# Altium PCB MT-MONITOR V1.0.0.PcbDoc (part 2 of 3)
Units mil, origin at the board's own origin, x right, y up, seen from the top; angles counter-clockwise.
Board outline 6300 x 4410 mil, 2 copper layers (Top Layer, Bottom Layer); 313 components, 231 nets, 1781 pads, 138 vias.
Unrouted connection lines stored in the file: 1.
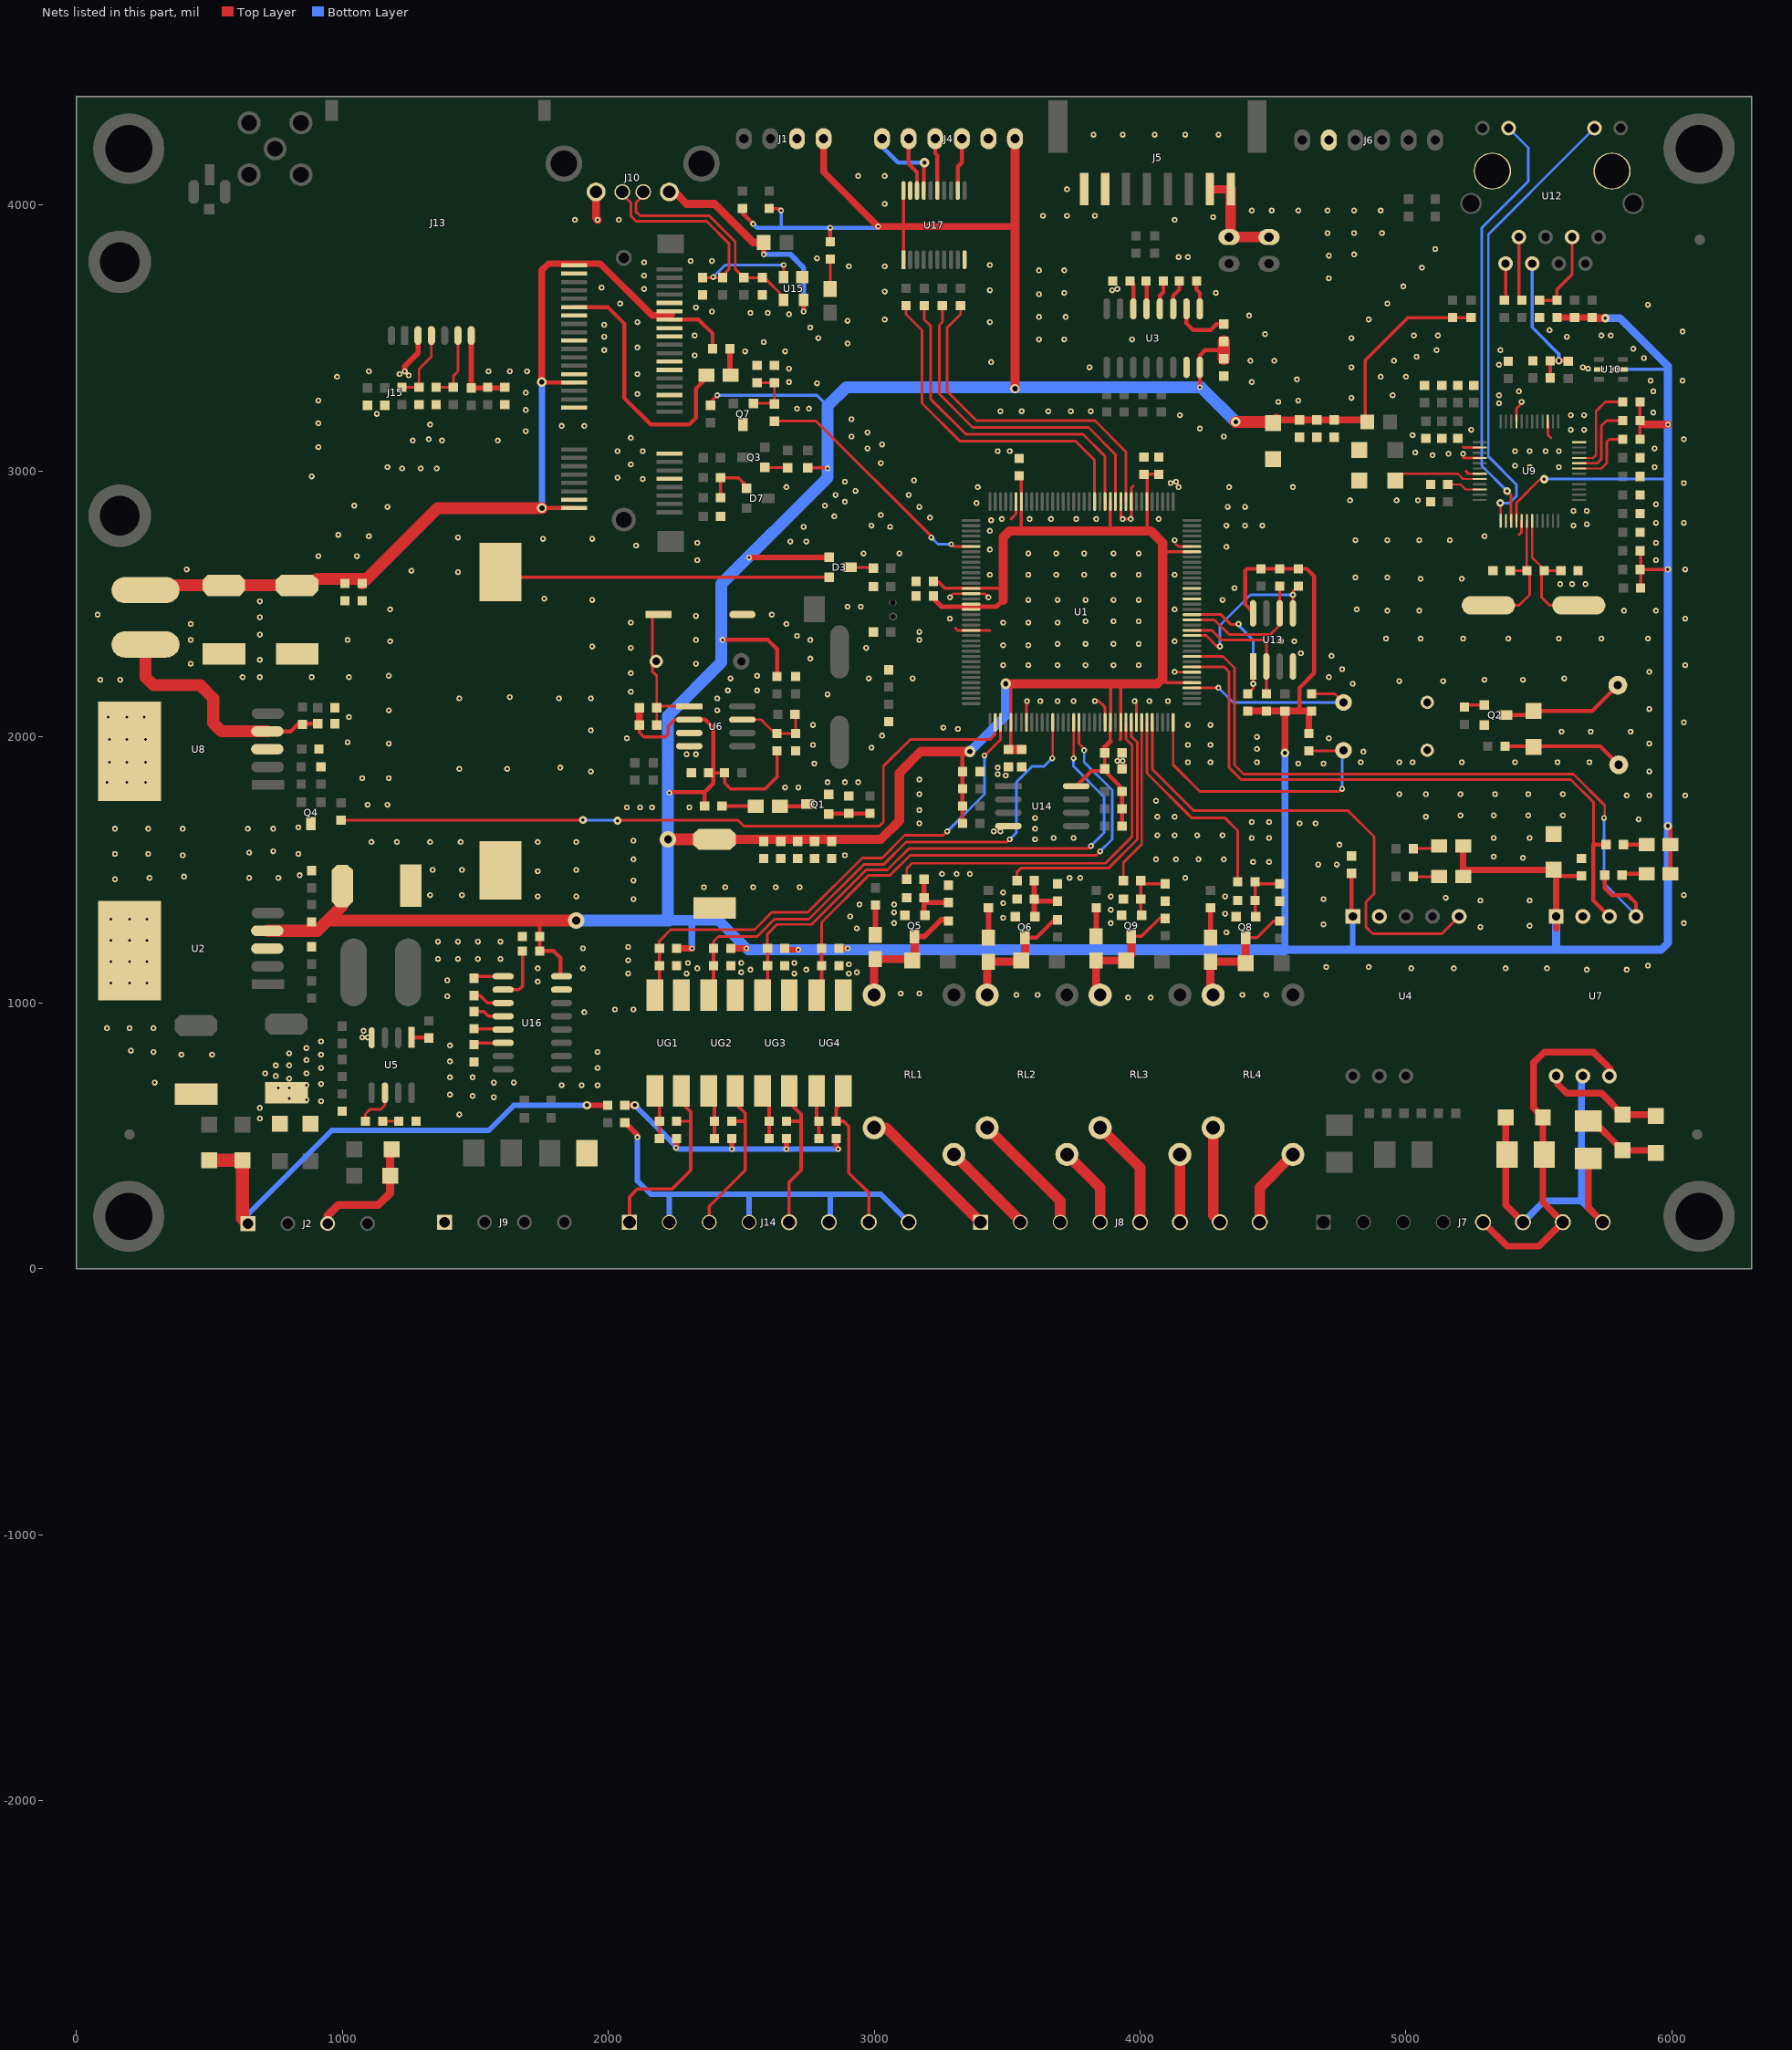
[diagram p2: the nets of this part, all layers, seen from the top]

## Via types
v1: diameter 22, hole 10, Top Layer to Bottom Layer, 82 vias
v2: diameter 24, hole 10, Top Layer to Bottom Layer, 15 vias
v3: diameter 30, hole 12, Top Layer to Bottom Layer, 10 vias
v4: diameter 32, hole 15, Top Layer to Bottom Layer, 7 vias
v5: diameter 36, hole 18, Top Layer to Bottom Layer, 4 vias
v6: diameter 36, hole 20, Top Layer to Bottom Layer, 3 vias
v7: diameter 32, hole 12, Top Layer to Bottom Layer, 2 vias
v8: diameter 40, hole 20, Top Layer to Bottom Layer, 2 vias
v9: diameter 36, hole 15, Top Layer to Bottom Layer, 2 vias
v10: diameter 62, hole 30, Top Layer to Bottom Layer, 2 vias
v11: diameter 52, hole 28, Top Layer to Bottom Layer, 1 vias
v12: diameter 24, hole 12, Top Layer to Bottom Layer, 1 vias
v13: diameter 32, hole 18, Top Layer to Bottom Layer, 1 vias
v14: diameter 50, hole 28, Top Layer to Bottom Layer, 1 vias
v15: diameter 32, hole 16, Top Layer to Bottom Layer, 1 vias
v16: diameter 28, hole 15, Top Layer to Bottom Layer, 1 vias
v17: diameter 22, hole 12, Top Layer to Bottom Layer, 1 vias
v18: diameter 25, hole 12, Top Layer to Bottom Layer, 1 vias
v19: diameter 42, hole 20, Top Layer to Bottom Layer, 1 vias

## Nets (pads, with @x,y where several pads share a name; then routed paths per layer and width w, separated by ;. In a path a pad name is that pad's centre, name@x,y a point inside that pad or via, vN(x,y) a via of type N, cw(c..) or ccw(c..) an arc to the next point about the centre after c; other vN are vias at no path point)
3.9V: C52.1 C60.1 EC5.1 EC6.1 J15.2 J15.24 J15.39 J15.41 J15.52 L6.2 R103.1 | length 3636.6
  Top Layer w15: v6(1750,3335) 1751.81,3333.19 J15.24@1871.73,3333.19 ; v6(1750.75,2860.75) J15.2@1871.73,2860.75 ; 2230,3590 2230,3585 J15.39@2230,3569.41 2340.59,3569.41 2392.5,3517.5 R103.1@2392.5,3460
  Top Layer w25: v6(1750,3335) 1750,3755 1775,3780 1970,3780 2165,3585 2230,3585 2235,3585 2240,3590 2230,3590
  Top Layer w45: L6.2@260,2552.36 277.65,2570.01 EC5.1@554.57,2570.01 EC6.1@829.57,2570.01 880.01,2570.01 905,2595 1092.5,2595 ; C52.1@1075,2577.5 1092.5,2595 ; v6(1750.75,2860.75) 1358.25,2860.75 1092.5,2595
  Bottom Layer w25: v6(1750,3335) 1750.75,3334.25 v6(1750.75,2860.75)
12VI: R101.2 R129.1 R137.1 R139.1 R141.1 | length 1020.1
  Top Layer w20: R101.2@2062.5,615 v4(2100,615) ; v1(2255,455) 2257.5,457.5 R129.1@2257.5,490 ; R137.1@2464.17,490 2464.17,450.83 v1(2465,450) ; v1(2670,450) 2670.83,450.83 R139.1@2670.83,490 ; R141.1@2857.5,490 2857.5,457.5 v1(2865,450)
  Bottom Layer w20: v4(2100,615) v1@2257.5,457.5 ; 2265,450 v1(2465,450) v1(2670,450) v1(2865,450)
12VS: D8.1 D9.1 J2.1 R101.1 | length 1931
  Top Layer w20: v4(1920,615) R101.1@1997.5,615
  Top Layer w50: D9.1@500,407.5 D8.1@625,407.5 625,190 J2.1@645,170
  Bottom Layer w20: J2.1@645,170 645,210 650,210 960,520 1550,520 1645,615 v4(1920,615)
485_CON2: U1.68 U4.5 | length 1854.7
  Top Layer w10: U1.68@4045.75,2054.65 4045.75,1879.25 4202.5,1722.5 4782.5,1722.5 4880,1625 4880,1410 4850,1380 4850,1285 4875,1260 5135,1260 U4.5@5200,1325
ACT_LED: U9.27 U12.11 | length 1625.6
  Top Layer w10: v3(5380,2925) 5395.59,2909.41 U9.27@5395.59,2812.98
  Bottom Layer w10: v3(5380,2925) 5285,3020 5285,3915 5460,4090 5460,4216.01 U12.11@5386.23,4289.78
CAN_RD1: R39.2 U1.82 U7.4 | length 2710.3
  Top Layer w10: U1.82@4195.35,2302.68 4312.68,2302.68 4355,2260.36 4355,1895 4390,1860 5630,1860 5747.5,1742.5 5747.5,1692.5 v1(5745,1695)
  Top Layer w15: R39.2@5747.5,1480 5747.5,1432.5 5775,1405 5835,1405 5865,1375 U7.4@5865,1325
  Bottom Layer w10: v1(5745,1695) 5745,1450 5865,1330 U7.4@5865,1325
CAN_RD2: U1.95
CAN_TD1: R37.2 U1.80 U7.3 | length 2433.4
  Top Layer w10: U1.80@4195.35,2263.31 4316.69,2263.31 4335,2245 4335,1885 4380,1840 5620,1840 5705,1755 5705,1595
  Top Layer w15: R37.2@5752.5,1595 5705,1595 5705,1385 U7.3@5765,1325
CAN_TD2: U1.93
CANH2: J7.5 J7.7 R38.2 TVS6.1 U7.6 | length 1368.6
  Top Layer w25: J7.5@5290,175 5380,85 5500,85 J7.7@5590,175 5515,250 R38.2@5515,570 5480,605 5480,775 5520,815 5705,815 5770,750 U7.6@5770,735
CANL2: J7.6 J7.8 R38.1 TVS5.2 TVS6.2 U7.7 | length 1535.1
  Top Layer w25: R38.1@5375,570 5375,240 J7.6@5440,175 ; TVS5.2@5685.5,415.17 5685.5,229.5 J7.8@5740,175
  Bottom Layer w25: J7.6@5440,175 5520,255 5660,255 ; U7.7@5670,735 5660,725 5660,255 ; J7.8@5740,175 5660,255
DGND: BAT1.2 C1.2 C2.2 C3.2 C4.2 C5.2 C6.2 C7.2 C8.2 C9.2 C10.2 C11.2 C12.1 C13.2 C14.2 C15.2 C16.2 C17.1 C20.1 C21.1 C22.2 C24.1 C25.2 C27.2 C28.1 C29.1 C31.2 C32.1 C33.2 C36.2 C37.2 C38.2 C39.1 C40.2 C41.2 C42.2 C43.2 C44.1 C45.2 C46.2 C48.2 C49.2 C50.2 C52.2 C53.2 C54.2 C55.2 C56.2 C57.2 C58.2 C59.2 C60.2 C61.2 C62.2 C64.2 C66.2 C67.2 C68.2 C69.2 C70.2 C71.2 C77.2 C78.1 C79.1 C80.2 C81.2 C83.2 C88.1 EC1.2 EC2.2 EC3.2 EC4.2 EC5.2 EC6.2 J1.3 J4.5 J5.7 J5.8 J6.2 J9.1 J10.4 J13.4 J15.4 J15.9 J15.15 J15.18 J15.21 J15.26 J15.27 J15.29 J15.34 J15.35 J15.37 J15.40 J15.43 J15.50 L7.2 L8.2 pad.0@690,2225 pad.1@885,2225 pad.2@1025,2225 pad.3@145,1560 pad.3@1175,2230 pad.4 pad.5 pad.6 pad.7 pad.8 pad.9 pad.10 pad.11 pad.12 pad.13 pad.14 pad.15 pad.16 pad.17 pad.18 pad.19 pad.20 pad.21 pad.22 pad.23 pad.24 pad.25 pad.26 pad.27 pad.28 pad.29 pad.30 pad.31 pad.32 pad.33 pad.34 pad.35 pad.36 pad.37 pad.38 pad.39 pad.40 pad.41 pad.42 pad.43 pad.44 pad.45 pad.46 pad.47 pad.48 pad.49 pad.50 pad.51 pad.52 pad.53 pad.54 pad.55 pad.56 pad.57 pad.58 pad.59 pad.60 pad.61 pad.62 pad.63 pad.64 pad.65 pad.66 pad.67 pad.68 pad.69 pad.70 pad.71 pad.72 pad.73 pad.74 pad.75 pad.76 pad.77 pad.78 pad.79 pad.80 pad.81 pad.82 pad.83 pad.84 pad.85 pad.86 pad.87 pad.88 pad.89 pad.90 pad.91 pad.92 pad.93 pad.94 pad.95 pad.96 pad.97 pad.98 pad.99 pad.100 pad.101 pad.102 pad.103 pad.104 pad.105 pad.106 pad.107 pad.108 pad.109 pad.110 pad.111 pad.112 pad.113 pad.114 pad.115 pad.116 pad.117 pad.118 pad.119 pad.120 pad.121 pad.122 pad.123 pad.124 pad.125 pad.126 pad.127 pad.128 pad.129 pad.130 pad.131 pad.132 pad.133 pad.134 pad.135 pad.136 pad.137 pad.138 pad.139 pad.140 pad.141 pad.142 pad.143 pad.144 pad.145 pad.146 pad.147 pad.148 pad.149 pad.150 pad.151 pad.152 pad.153 pad.154 pad.155 pad.156 pad.157 pad.158 pad.159 pad.160 pad.161 pad.162 pad.163 pad.164 pad.165 pad.166 pad.167 pad.168 pad.169 pad.170 pad.171 pad.172 pad.173 pad.174 pad.175 pad.176 pad.177 pad.178 pad.179 pad.180 pad.181 pad.182 pad.183 pad.184 pad.185 pad.186 pad.187 pad.188 pad.189 pad.190 pad.191 pad.192 pad.193 pad.194 pad.195 pad.196 pad.197 pad.198 pad.199 pad.200 pad.201 pad.202 pad.203 pad.204 pad.205 pad.206 pad.207 pad.208 pad.209 pad.210 pad.211 pad.212 pad.213 pad.214 pad.215 pad.216 pad.217 pad.218 pad.219 pad.220 pad.221 pad.222 pad.223 pad.224 pad.225 pad.226 pad.227 pad.228 pad.229 pad.230 pad.231 pad.232 pad.233 pad.234 pad.235 pad.236 pad.237 pad.238 pad.239 pad.240 pad.241 pad.242 pad.243 pad.244 pad.245 pad.246 pad.247 pad.248 pad.249 pad.250 pad.251 pad.252 pad.253 pad.254 pad.255 pad.256 pad.257 pad.258 pad.259 pad.260 pad.261 pad.262 pad.263 pad.264 pad.265 pad.266 pad.267 pad.268 pad.269 pad.270 pad.271 pad.272 pad.273 pad.274 pad.275 pad.276 pad.277 pad.278 pad.279 pad.280 pad.281 pad.282 pad.283 pad.284 pad.285 pad.286 pad.287 pad.288 pad.289 pad.290 pad.291 pad.292 pad.293 pad.294 pad.295 pad.296 pad.297 pad.298 pad.299 pad.300 pad.301 pad.302 pad.303 pad.304 pad.305 pad.306 pad.307 pad.308 pad.309 pad.310 pad.311 pad.312 pad.313 pad.314 pad.315 pad.316 pad.317 pad.318 pad.319 pad.320 pad.321 pad.322 pad.323 pad.324 pad.325 pad.326 pad.327 pad.328 pad.329 pad.330 pad.331 pad.332 pad.333 pad.334 pad.335 pad.336 pad.337 pad.338 pad.339 pad.340 pad.341 pad.342 pad.343 pad.344 pad.345 pad.346 pad.347 pad.348 pad.349 pad.350 pad.351 pad.352 pad.353 pad.354 pad.355 pad.356 pad.357 pad.358 pad.359 pad.360 pad.361 pad.362 pad.363 pad.364 pad.365 pad.366 pad.367 pad.368 pad.369 pad.370 pad.371 pad.372 pad.373 pad.374 pad.375 pad.376 pad.377 pad.378 pad.379 pad.380 pad.381 pad.382 pad.383 pad.384 pad.385 pad.386 pad.387 pad.388 pad.389 pad.390 pad.391 pad.392 pad.393 pad.394 pad.395 pad.396 pad.397 pad.398 pad.399 pad.400 pad.401 pad.402 pad.403 pad.404 pad.405 pad.406 pad.407 pad.408 pad.409 pad.410 pad.411 pad.412 pad.413 pad.414 pad.415 pad.416 pad.417 pad.418 pad.419 pad.420 pad.421 pad.422 pad.423 pad.424 pad.425 pad.426 pad.427 pad.428 pad.429 pad.430 pad.431 pad.432 pad.433 pad.434 pad.435 pad.436 pad.437 pad.438 pad.439 pad.440 pad.441 pad.442 pad.443 pad.444 pad.445 pad.446 pad.447 pad.448 pad.449 pad.450 pad.451 pad.452 pad.453 pad.454 pad.455 pad.456 pad.457 pad.458 pad.459 pad.460 pad.461 pad.462 pad.463 pad.464 pad.465 pad.466 pad.467 pad.468 pad.469 pad.470 pad.471 pad.472 pad.473 pad.474 pad.475 pad.476 pad.477 pad.478 pad.479 pad.480 pad.481 pad.482 pad.483 pad.484 pad.485 pad.486 pad.487 pad.488 pad.489 pad.490 pad.491 pad.492 pad.493 pad.494 pad.495 pad.496 pad.497 pad.498 pad.499 pad.500 pad.501 pad.502 pad.503 pad.504 pad.505 pad.506 pad.507 pad.508 pad.509 pad.510 pad.511 pad.512 pad.513 pad.514 pad.515 pad.516 pad.517 pad.518 pad.519 pad.520 pad.521 pad.522 pad.523 pad.524 pad.525 pad.526 pad.527 pad.528 pad.529 pad.530 pad.531 pad.532 pad.533 pad.534 pad.535 pad.536 pad.537 pad.538 pad.539 pad.540 pad.541 pad.542 pad.543 pad.544 pad.545 pad.546 pad.547 pad.548 pad.549 pad.550 pad.551 pad.552 pad.553 pad.554 pad.555 pad.556 pad.557 pad.558 pad.559 pad.560 pad.561 pad.562 pad.563 pad.564 pad.565 pad.566 pad.567 pad.568 pad.569 pad.570 pad.571 pad.572 pad.573 pad.574 pad.575 pad.576 pad.577 pad.578 pad.579 pad.580 pad.581 pad.582 pad.583 pad.584 pad.585 pad.586 pad.587 pad.588 pad.589 pad.590 pad.591 pad.592 pad.593 pad.594 pad.595 pad.596 pad.597 pad.598 pad.599 pad.600 pad.601 pad.602 pad.603 pad.604 pad.605 pad.606 pad.607 pad.608 pad.609 pad.610 pad.611 pad.612 pad.613 pad.614 pad.615 pad.616 pad.617 pad.618 pad.619 pad.620 pad.621 pad.622 pad.623 pad.624 pad.625 pad.626 pad.627 pad.628 pad.629 pad.630 pad.631 pad.632 pad.633 pad.634 pad.635 pad.636 pad.637 pad.638 pad.639 pad.640 pad.641 pad.642 pad.643 pad.644 pad.645 pad.646 pad.647 pad.648 pad.649 pad.650 pad.651 pad.652 pad.653 pad.654 pad.655 pad.656 pad.658 pad.659 pad.660 pad.661 pad.662 pad.663 pad.664 pad.665 pad.666 pad.667 pad.668 pad.669 pad.670 pad.671 pad.672 pad.673 pad.674 pad.675 pad.676 pad.677 pad.678 pad.679 pad.680 pad.681 pad.682 pad.683 pad.684 pad.685 pad.686 pad.687 Q1.3 Q2.3 Q4.2 Q5.3 Q6.3 Q7.2 Q8.3 Q9.3 R7.1 R25.2 R27.2 R35.1 R49.2 R50.1 R54.2 R55.2 R57.2 R59.2 R60.2 R88.1 R89.1 R91.2 R94.1 R114.2 R125.1 R126.1 R127.1 R128.1 SW2.1 SW3.2 SW4.1 TVS2.1 U1.15 U1.22 U1.44 U1.59 U1.65 U1.79 U1.103 U1.117 U1.119 U1.139 U2.3 U2.6 U3.15 U4.2 U5.4 U6.3 U6.4 U7.2 U8.3 U8.6 U9.3 U9.9 U9.14 U9.16 U9.19 U9.29 U9.48 U10.2 U13.4 U14.4 U15.1 U16.15 U17.10 U17.19 UG1.3 UG2.3 UG3.3 UG4.3 | length 1629.5
  Top Layer w10: v1(3285,2525) 3298.9,2538.9 U1.15@3364.65,2538.9 3416.1,2538.9 v1(3430,2525) ; 3305,2410 3313.9,2401.1 U1.22@3364.65,2401.1 3433.9,2401.1 3435,2400 ; 3515,2820 3515.62,2820 3533.94,2838.32 U1.139@3533.94,2885.35 ; U1.44@3573.31,2054.65 3573.31,2133.31 pad.465@3575,2135 ; pad.469@3830,2135 3845,2135 3868.58,2111.42 U1.59@3868.58,2054.65 ; U1.119@3927.64,2885.35 3927.64,2827.36 pad.624@3935,2820 v1(3965,2820) 3967.01,2822.01 U1.117@3967.01,2885.35 3967.01,2937.01 3975,2945 ; pad.470@3980,2135 3986.69,2128.31 U1.65@3986.69,2054.65 ; pad.473@4130,2245 4131.38,2243.62 U1.79@4195.35,2243.62 ; 4135,2725 4143.94,2716.06 U1.103@4195.35,2716.06 ; 5215,3050 5215.8,3049.2 U9.16@5277.48,3049.2 ; 5215,3090 5216.42,3088.57 U9.14@5277.48,3088.57 ; 5225,3000 5234.85,2990.15 U9.19@5277.48,2990.15 ; U9.9@5415.27,3187 5415.27,3235.27 5430,3250 ; 5425,2760 5434.96,2769.96 U9.29@5434.96,2812.98 ; U9.3@5533.38,3187 5533.38,3136.62 5545,3125
  Top Layer w20: v1(1235,3375) 1235,3395 1285,3445 J13.4@1285,3510
  Top Layer w30: J10.4@1954.41,4050 1954.41,3950.59 pad.611@1960,3945
DI1: C62.1 R130.2 U1.39 UG1.4 | length 1956
  Top Layer w10: R130.2@2192.5,1205 2192.5,1232.5 2235,1275 2550,1275 2615,1340 2750,1340 2955,1545 3030,1545 3115,1630 3260,1630 v1(3275,1645) ; v1(3415,1930) 3474.88,1989.88 U1.39@3474.88,2054.65
  Top Layer w13: UG1.4@2175.3,1029.39 2192.5,1046.59 C62.1@2192.5,1140 R130.2@2192.5,1205
  Bottom Layer w10: v1(3275,1645) 3415,1785 v1(3415,1930)
DI2: C64.1 R138.2 U1.49 UG2.4 | length 2015.1
  Top Layer w10: R138.2@2395.83,1205 2395.83,1230.83 2415,1250 2560,1250 2625,1315 2755,1315 2960,1520 3035,1520 3120,1605 3500,1605 v1(3510,1615) ; v1(3670,1920) 3671.73,1921.73 U1.49@3671.73,2054.65
  Top Layer w13: UG2.4@2378.09,1029.39 2395.83,1047.13 C64.1@2395.83,1140 R138.2@2395.83,1205
  Bottom Layer w10: v1(3510,1615) 3535,1640 3535,1830 3595,1890 3640,1890 v1(3670,1920)
DI3: C81.1 R140.2 U1.53 UG3.4 | length 2123.4
  Top Layer w10: R140.2@2599.17,1205 2599.17,1259.17 2635,1295 2765,1295 2970,1500 3050,1500 3130,1580 3805,1580 v1(3815,1590) ; v1(3750,1920) 3750.47,1920.47 U1.53@3750.47,2054.65
  Top Layer w13: UG3.4@2580.89,1029.39 2599.17,1047.67 C81.1@2599.17,1140 R140.2@2599.17,1205
  Bottom Layer w10: v1(3750,1920) 3750,1890 3865,1775 3865,1640 v1(3815,1590)
DI4: C83.1 R142.2 U1.54 UG4.4 | length 1994.3
  Top Layer w10: R142.2@2802.5,1205 2802.5,1302.5 2980,1480 3060,1480 3135,1555 3835,1555 v1(3850,1570) ; U1.54@3770.16,2054.65 3770,2054.49 3770,1975 3790,1955 v1(3790,1950)
  Top Layer w13: UG4.4@2783.68,1029.39 2802.5,1048.21 C83.1@2802.5,1140 R142.2@2802.5,1205
  Bottom Layer w10: v1(3790,1950) 3790,1905 3895,1800 3895,1615 v1(3850,1570)
DI-1: C65.2 J14.1 UG1.2 | length 732.7
  Top Layer w10: C65.2@2257.5,555 2310,555
  Top Layer w13: J14.1@2080,175 2080,270 2110,300 2240,300 2310,370 2310,555 2310,590 2275.3,624.7 UG1.2@2275.3,669.39
DI-2: C63.2 J14.3 UG2.2 | length 616.4
  Top Layer w13: J14.3@2380,175 2380,235 2515,370 2515,555 ; C63.2@2464.17,555 2515,555 ; UG2.2@2478.09,669.39 2478.09,621.91 2515,585 2515,555
DI-3: C84.2 J14.5 UG3.2 | length 585.5
  Top Layer w13: C84.2@2670.83,555 2725,555 ; J14.5@2680,175 2680,325 2725,370 2725,555 ; UG3.2@2680.89,669.39 2680.89,624.11 2725,580 2725,555
DI-4: C82.2 J14.7 UG4.2 | length 572.1
  Top Layer w13: UG4.2@2883.68,669.39 2883.68,628.68 2857.5,602.5 C82.2@2857.5,555 2885,555 2905,535 2905,360 2980,285 J14.7@2980,175
DO1: R121.1 U1.63 | length 1376.2
  Top Layer w10: R121.1@3122.5,1465 3122.5,1505 3142.5,1525 3870,1525 3970,1625 3970,1970 3947.32,1992.68 U1.63@3947.32,2054.65
DO1_1: J8.1 RL1.3 | length 547
  Top Layer w40: RL1.3@3000,530 3045,530 J8.1@3400,175
DO1_2: J8.2 RL1.4 | length 358.6
  Top Layer w40: RL1.4@3300,430 3550,180 J8.2@3550,175
DO2: R122.1 U1.64 | length 984.9
  Top Layer w10: R122.1@3537.5,1460 3537.5,1492.5 3551.25,1506.25 3881.25,1506.25 3990,1615 3990,1980 3967.01,2002.99 U1.64@3967.01,2054.65
DO2_1: J8.3 RL2.3 | length 468.9
  Top Layer w40: RL2.3@3425,530 3700,255 J8.3@3700,175
DO2_2: J8.4 RL2.4 | length 306.8
  Top Layer w40: RL2.4@3725,430 3850,305 J8.4@3850,175
DO3: R123.1 U1.66 | length 623.2
  Top Layer w8: 4006.38,1596.38 U1.66@4006.38,2054.65
  Top Layer w10: R123.1@3937.5,1460 3937.5,1527.5 4006.38,1596.38
DO3_1: J8.5 RL3.3 | length 417.1
  Top Layer w40: RL3.3@3850,530 4000,380 J8.5@4000,175
DO3_2: J8.6 RL3.4 | length 255
  Top Layer w40: J8.6@4150,175 RL3.4@4150,430
DO4: R124.1 U1.67 | length 814.3
  Top Layer w10: U1.67@4026.06,2054.65 4026.06,1863.94 4195,1695 4320,1695 4367.5,1647.5 R124.1@4367.5,1455
DO4_1: J8.7 RL4.3 | length 365.4
  Top Layer w40: RL4.3@4275,530 4275,200 J8.7@4300,175
DO4_2: J8.8 RL4.4 | length 306.8
  Top Layer w40: J8.8@4450,175 4450,305 RL4.4@4575,430
DP3V3: C1.1 C2.1 C3.1 C4.1 C5.1 C6.1 C7.1 C8.1 C9.1 C10.1 C11.1 C12.2 C13.1 C14.1 C15.1 C16.1 C19.2 C20.2 C22.1 C25.1 C26.1 C27.1 C31.1 C32.2 C45.1 C48.1 C49.1 C86.2 D1.1 D2.1 D3.1 D4.1 D5.1 EC1.1 EC2.1 J1.4 J4.6 L3.1 R1.2 R2.2 R6.2 R23.2 R24.2 R26.2 R28.1 R29.1 R30.1 R45.1 R46.2 R47.2 R48.2 R51.1 R52.1 R53.1 R58.2 R65.2 R66.2 R67.2 R70.1 R71.1 R74.1 R75.1 R76.1 R77.1 R78.1 R79.1 R80.1 R81.1 R82.1 R83.1 R84.1 R85.1 R90.2 R115.1 R130.1 R138.1 R140.1 R142.1 U1.14 U1.17 U1.18 U1.41 U1.60 U1.62 U1.77 U1.102 U1.114 U1.121 U1.138 U2.4 U3.16 U4.1 U6.2 U7.1 U9.28 U10.5 U13.8 U14.8 U16.16 U17.1 U17.20 | length 30756
  Top Layer w10: U9.28@5415.27,2812.98 5415.27,2880.27 5505,2970 v7(5520,2970)
  Top Layer w12: C26.1@2117.5,2045 2117.5,2017.5 2135,2000 2215,2000 2225,2010 2225,2040 2250.24,2065.24 U6.2@2304.75,2065.24 U6.2@2315,2065.24 ; R115.1@2385,3247.5 2385,3260 v1(2410,3285) ; 2395,1865 R28.1@2437.5,1865 2437.5,1827.5 2460,1805 2590,1805 2635,1850 R29.1@2635,1947.5 ; R1.2@2605,3987.5 2642.5,3987.5 v1(2650,3980) ; R45.1@2750,3012.5 2822.5,3012.5 v1(2825,3010) ; U17.1@3110,3795 3110,3920 U17.20@3110,4054.84 ; C12.2@3222.5,2585 3240,2585 3266.42,2558.58 U1.14@3364.65,2558.58 3483.58,2558.58 3485,2560 ; C13.1@3505,1952.5 3514.25,1961.75 U1.41@3514.25,2054.65 3514.25,2199.25 3515,2200 ; C1.1@3550,2982.5 3553.62,2978.88 U1.138@3553.62,2885.35 3553.62,2781.38 3560,2775 ; C9.1@3867.5,1880 C15.1@3867.5,1940 3867.5,1962.5 ; 3885,2775 3888.27,2778.27 U1.121@3888.27,2885.35 ; 3888.27,1983.27 U1.60@3888.27,2054.65 3890,2056.38 3890,2200 ; 3920,2200 3927.64,2192.36 U1.62@3927.64,2054.65 3927.64,1992.64 3925,1990 ; 4040,2775 4026.06,2788.94 U1.114@4026.06,2885.35 4026.06,2976.44 C22.1@4015,2987.5 C10.1@4070,2987.5 ; 4085,2220 4100.75,2204.25 U1.77@4195.35,2204.25 ; 4085,2695 4086.38,2696.38 U1.102@4195.35,2696.38 ; U13.8@4425,2465 U13.8@4425,2470 ; L3.1@4847.5,3192.5 4847.5,3417.5 5007.5,3577.5 R71.1@5175,3577.5 R70.1@5245,3577.5 ; R47.2@5880,2630 R47.2@5882.5,2630 ; R51.1@5879.99,3120 R52.1@5879.99,3190 R53.1@5879.99,3260 ; R48.2@5882.5,2560 R47.2@5882.5,2630 ; R46.2@5882.5,2697.5 R47.2@5882.5,2630 ; v12(5985,2630) R47.2@5882.5,2630
  Top Layer w15: 1740,1310 1742.5,1307.5 C2.1@1742.5,1250 C86.2@1742.5,1195 1795,1195 1820,1170 1820,1104.5 U16.16@1824.8,1099.7 ; v1(2230,1790) 2232.5,1792.5 2362.5,1792.5 ; U6.2@2315,2065.24 2364.76,2065.24 2395,2035 2395,1865 2395,1825 2362.5,1792.5 ; R24.2@2362.5,1740 2362.5,1792.5 ; v1(2430,2365) 2600,2365 2635,2330 R30.1@2635,2227.5 ; R2.2@2505,3987.5 2505,3970 v1(2545,3930) ; R90.2@2835,3862.5 v1(2835,3915) ; R80.1@3332.5,1675 R81.1@3332.5,1740 R82.1@3332.5,1805 C16.1@3332.5,1870 3332.5,1942.5 ; U14.8@3760,1815 3817.5,1872.5 3867.5,1872.5 3932.5,1807.5 R83.1@3932.5,1795 R84.1@3932.5,1730 R85.1@3932.49,1665 ; v1(4225,3315) 4224.7,3315.3 U3.16@4224.7,3390.2 4224.7,3434.7 4245,3455 4315,3455 ; U13.8@4425,2470 4395,2500 4395,2625 4402.5,2632.5 R77.1@4455,2632.5 R78.1@4525,2632.5 R79.1@4595,2632.5 4627.5,2632.5 4655,2605 4655,2240 4600,2185 4600,2102.5 4605,2097.5 ; C25.1@4795,1487.5 4795,1330 U4.1@4800,1325 ; C31.1@5577.1,1477.5 C32.2@5660,1477.5 ; v4(5985,1665) 5994.91,1655.09 D5.1@5994.91,1595.34 D4.1@5994.91,1485.34
  Top Layer w18: C11.1@3222.5,2530 3222.5,2520.83 3253.33,2490 3460,2490 3485,2515 ; 3867.5,1962.5 3888.27,1983.27
  Top Layer w20: v1(2530,2675) 2530.49,2675.49 D3.1@2830.35,2675.49 ; R140.1@2664.17,1205 2669.17,1200 v1(2715,1200) ; R142.1@2867.5,1205 v1(2900,1205)
  Top Layer w25: C26.1@2117.5,2045 R26.2@2117.5,2110 ; R130.1@2257.5,1205 v1(2315,1205) ; R138.1@2460.83,1205 v1(2520,1205) ; J1.4@2810,4250 2810,4125 v1(3015,3920) 3110,3920 3530,3920 ; R76.1@4405,2097.5 R75.1@4475,2097.5 R74.1@4545,2097.5 ; C45.1@4513.06,3192.5 C48.1@4600,3192.5 C49.1@4665,3192.5 C8.1@4730,3192.5 L3.1@4847.5,3192.5 ; v4(4545,1940) R74.1@4545,2097.5 ; R58.2@4635,2012.5 R23.2@4635,2097.5 ; R23.2@4645,2097.5 R23.2@4635,2097.5 ; D2.1@5214.91,1590.34 5214.91,1495 5219.99,1500.08 C31.1@5554.52,1500.08 5565,1489.6 U7.1@5565,1325 5565,1280 ; R67.2@5568,3577.5 R65.2@5634,3577.5 R66.2@5700,3577.5 ; R74.1@4545,2097.5 4605,2097.5 R23.2@4635,2097.5
  Top Layer w30: R66.2@5700,3577.5 5702.5,3575 v7(5750,3575) ; R52.1@5879.99,3190 5894.99,3175 v1(5985,3175)
  Top Layer w35: EC1.1@2399.57,1615.01 3025.01,1615.01 3095,1685 3095,1865 3175,1945 3335,1945 ; 3332.5,1942.5 3335,1945 ; v19(3360,1945) 3335,1945 ; 3485,2515 3485,2560 3485,2750 3510,2775 3560,2775 3885,2775 4040,2775 4085,2730 4085,2695 4085,2220 4065,2200 3920,2200 3890,2200 3515,2200 v8(3495,2200) ; C13.1@3505,1952.5 C14.1@3555,1952.5 ; v6(3530,3310) 3530,3920 J4.6@3530,4250
  Top Layer w45: U2.4@718.05,1271.15 906.15,1271.15 945,1310 ; EC2.1@999.99,1439.57 999.99,1364.99 945,1310 ; v10(1880,1310) 1740,1310 945,1310 ; v10(2225,1615) EC1.1@2399.57,1615.01 ; C20.2@4315,3422.5 4315,3455 C19.2@4315,3487.5 ; v5(4360,3185) 4505.56,3185 C45.1@4513.06,3192.5
  Bottom Layer w10: v7(5520,2970) 5980,2970 5985,2965
  Bottom Layer w12: v1(2410,3285) 2785,3285 2825,3245 ; 2645,3915 2650,3915 v1(2650,3980) ; v1(5787.32,3382.68) 5972.68,3382.68 5985,3395
  Bottom Layer w15: v1(2545,3930) 2560,3915 2645,3915 ; 2650,3915 v1(2835,3915) 3005,3915 ; 4795,1200 4800,1205
  Bottom Layer w20: 4800,1205 U4.1@4800,1325
  Bottom Layer w25: v1(2315,1205) 2315,1310 ; 4545,1200 v4(4545,1940)
  Bottom Layer w30: 4545,1200 4795,1200 5565,1200 ; U7.1@5565,1325 5565,1200 ; v7(5750,3575) 5805,3575 5985,3395 v1(5985,3175) 5985,2965 v12(5985,2630) v4(5985,1665) 5985,1225 5960,1200 5565,1200
  Bottom Layer w35: v19(3360,1945) 3495,2080 v8(3495,2200)
  Bottom Layer w40: 2230,1310 2315,1310 2415,1310 v1(2520,1205) 2525,1200 v1(2715,1200) 4545,1200
  Bottom Layer w45: v10(1880,1310) 2230,1310 2225,1315 v10(2225,1615) 2225,2080 2425,2280 2425,2575 2825,2975 v1(2825,3010) 2825,3245 2895,3315 v1(4225,3315) 4230,3315 v5(4360,3185)
EGND: U12.13
EGND1: U12.14
FDX_LED: U9.26
FG: C72.2 J2.3 R116.2 | length 474.9
  Top Layer w30: J2.3@945,170 945,200 985,240 1135,240 1180,285 C72.2@1180,340 ; C72.2@1185.33,345.33 C72.2@1180,340 ; R116.2@1185.33,449.96 1180,444.63 C72.2@1180,350 C72.2@1180,340
FRAM_CS: R76.2 U1.90 U13.1 | length 534.2
  Top Layer w10: U1.90@4195.35,2460.16 4305,2460.16 4342.66,2422.5 v2@4367.5,2422.5 ; R76.2@4405,2162.5 4425,2182.5 v2(4425,2200) U13.1@4425,2265
  Bottom Layer w10: v2@4375,2415 4425,2365 v2(4425,2200)
  other v2: 4370,2425
FRAM_MISO: R75.2 U1.87 U13.2 | length 491.2
  Top Layer w10: U1.87@4195.35,2401.1 4270,2401.1 4306.1,2365 4465,2365 4475,2355 U13.2@4475,2265 R75.2@4475,2162.5
FRAM_MOSI: R79.2 U1.86 U13.5 | length 635.2
  Top Layer w10: U1.86@4195.35,2381.42 4248.58,2381.42 4290,2340 v2(4300,2340) ; U13.5@4575,2465 v2(4575,2535) 4575,2547.5 R79.2@4595,2567.5
  Bottom Layer w10: v2(4300,2340) 4300,2420 4415,2535 v2(4575,2535)
FRAM_SCK: R78.2 U1.89 U13.6 | length 514.6
  Top Layer w10: U1.89@4195.35,2440.47 4280,2440.47 4335.47,2385 4490,2385 4525,2420 U13.6@4525,2465 R78.2@4525,2567.5
GPRS_PWR: R93.1 U1.38 | length 2781
  Top Layer w10: R93.1@995,1687.5 v3(1905,1687.5) ; v3@2035,1687.5 2487.5,1687.5 2510,1665 3020,1665 3035,1680 3035,1890 3135,1990 3435,1990 3455.2,2010.2 U1.38@3455.2,2054.65
  Bottom Layer w10: v3(1905,1687.5) 2032.5,1687.5 v3(2035,1685)
GPRS_RESET: R110.2 U1.6 | length 937.9
  Top Layer w10: R110.2@2625,3187.5 2782.5,3187.5 3215,2755 v1(3215,2750) ; v1(3290,2725) 3298.94,2716.06 U1.6@3364.65,2716.06
  Bottom Layer w10: v1(3215,2750) 3240,2725 v1(3290,2725)
IGND: J14.2 J14.4 J14.6 J14.8 R102.2 | length 1640.9
  Top Layer w20: R102.2@2062.5,550 2110,502.5 v1(2110,495)
  Bottom Layer w20: v1(2110,495) 2110,330 2160,280 2230,280 ; J14.2@2230,175 2230,280 ; J14.4@2530,175 2530,280 ; J14.6@2830,175 2835,180 2835,280 ; J14.8@3130,175 3025,280 2835,280 ; 2230,280 2530,280 ; 2530,280 2835,280
ISP: R23.1 SW2.2 U1.76 | length 736.8
  Top Layer w10: U1.76@4195.35,2184.57 4294.57,2184.57 v1(4295,2185) ; R23.1@4635,2162.5 4732.85,2162.5 SW2.2@4765.35,2130
  Bottom Layer w10: v1(4295,2185) 4350,2130 SW2.2@4765.35,2130
LED-WARNING: R32.1 U1.118 | length 1297
  Top Layer w10: R32.1@3325,3622.5 3325,3590 3275,3540 3275,3300 3385,3190 3830,3190 3947.32,3072.68 U1.118@3947.32,2885.35
LED-WARNING1: J4.4 U17.12 | length 201.5
  Top Layer w15: U17.12@3314.72,4054.84 3314.72,4144.72 3330,4160 J4.4@3330,4250
LED_CHARGE: R31.1 U1.120 | length 1271.4
  Top Layer w10: R31.1@3256.67,3622.5 3256.67,3560 3245,3548.33 3245,3290 3371,3164 3806,3164 3907.95,3062.05 U1.120@3907.95,2885.35
LED_CHARGE1: J4.3 U17.15 | length 198.5
  Top Layer w15: J4.3@3230,4250 3230,4195 3237.95,4187.05 U17.15@3237.95,4054.84
LED_PWR: R63.1 U1.124 | length 1285.7
  Top Layer w10: R63.1@3120,3622.5 3120,3590 3180,3530 3180,3255 3323,3112 3758,3112 3829.21,3040.79 U1.124@3829.21,2885.35
LED_PWR1: J4.2 U17.18 | length 208.1
  Top Layer w15: J4.2@3130,4250 3130,4155 3161.18,4123.82 U17.18@3161.18,4054.84
LEDCS: R64.1 U1.122 | length 1276.8
  Top Layer w10: R64.1@3188.33,3622.5 3188.33,3570 3213.33,3545 3213.33,3270 3345.33,3138 3785.58,3138 3868.58,3055 U1.122@3868.58,2885.35
LEDCS1: J4.1 U17.17 | length 327.8
  Top Layer w15: U17.17@3186.77,4054.84 3186.77,4163.23 v9(3190,4160)
  Bottom Layer w15: J4.1@3030,4250 3030,4220 3090,4160 v9(3190,4160)
LINK_LED: U9.25 U12.10 | length 1731.4
  Top Layer w10: v3(5355,2880) 5356.22,2878.78 U9.25@5356.22,2812.98
  Bottom Layer w10: v3(5355,2880) 5390,2880 5415,2905 5415,2950 5310,3055 5310,3890 5632.14,4212.14 5632.14,4212.86 U12.10@5709.07,4289.78
MODE0: R53.2 U9.45 | length 347.5
  Top Layer w8: U9.45@5651.49,3049.2 5704.2,3049.2
  Top Layer w10: 5704.2,3049.2 5715,3060 5715,3225 5750,3260 R53.2@5814.99,3260
MODE1: R52.2 U9.44 | length 303.2
  Top Layer w8: U9.44@5651.49,3029.52 5719.52,3029.52
  Top Layer w10: 5719.52,3029.52 5735,3045 5735,3170 5755,3190 R52.2@5814.99,3190
MODE2: R51.2 U9.43 | length 256
  Top Layer w8: U9.43@5651.49,3009.84 5734.83,3009.84
  Top Layer w10: 5734.83,3009.84 5755,3030 5755,3110 5765,3120 R51.2@5814.99,3120
MODE8: R58.1 SW4.2 U1.72 | length 1118.5
  Top Layer w10: U1.72@4124.49,2054.65 4124.49,1895.51 4225,1795 4750,1795 v1(4760,1805) ; R58.1@4635,1947.5 4762.5,1947.5 SW4.2@4765,1950
  Bottom Layer w10: v1(4760,1805) 4760,1945 SW4.2@4765,1950
NetBAT1_1: BAT1.1 D3.3 | length 1243.4
  Top Layer w12: BAT1.1@1595,2620 1614.51,2600.49 D3.3@2830.35,2600.49
NetC18_1: C18.1 U3.3 | length 114.2
  Top Layer w15: U3.3@4124.7,3610.2 4124.7,3659.7 4147.5,3682.5 C18.1@4147.5,3715
NetC18_2: C18.2 U3.1 | length 109.9
  Top Layer w15: C18.2@4212.5,3715 4212.5,3682.5 4224.7,3670.3 U3.1@4224.7,3610.2
NetC19_1: C19.1 U3.2 | length 215
  Top Layer w15: U3.2@4174.7,3610.2 4174.7,3555.3 4200,3530 4265,3530 4287.5,3552.5 C19.1@4315,3552.5
NetC23_1: C23.1 U3.5 | length 105.7
  Top Layer w15: C23.1@4022.5,3715 4024.7,3712.8 U3.5@4024.7,3610.2
NetC23_2: C23.2 U3.4 | length 110.1
  Top Layer w15: U3.4@4074.7,3610.2 4074.7,3659.7 4087.5,3672.5 C23.2@4087.5,3715
NetC24_2: C24.2 U3.6 | length 109.9
  Top Layer w15: C24.2@3962.5,3715 3974.7,3702.8 U3.6@3974.7,3610.2
NetC26_2: C26.2 R26.1 SW1.1 SW3.1 U6.1 | length 566.8
  Top Layer w10: C26.2@2182.5,2045 R26.1@2182.5,2110 ; SW3.1@2189.76,2470.3 2165.57,2446.12 2165.57,2284.57 2165.57,2246.93 2182.5,2230 R26.1@2182.5,2110 ; U6.1@2304.75,2115.24 2187.74,2115.24 R26.1@2182.5,2110
NetC28_2: C28.2 R29.2 R33.1 U6.7 | length 295.6
  Top Layer w10: U6.7@2504.76,2065.24 2574.76,2065.24 2627.5,2012.5 R29.2@2635,2012.5 C28.2@2705,2012.5 2705,2082.5 R33.1@2702.5,2085
NetC30_1: C30.1 R36.1 U7.8 | length 452.3
  Top Layer w25: U7.8@5570,735 5570,695 5605,660 5735,660 C30.1@5815,580 R36.1@5934.63,580
NetC30_2: C30.2 R36.2 TVS5.1 | length 304.4
  Top Layer w25: TVS5.1@5685.5,555.17 5704.83,555.17 C30.2@5815,445 5929.63,445 R36.2@5939.96,434.67
NetC38_1: C38.1 R61.1 U9.30 Y3.1 | length 512.2
  Top Layer w8: R61.1@5454.64,2625.36 U9.30@5454.64,2812.98
  Top Layer w10: Y3.1@5310,2495 5425,2495 5465,2535 R61.1@5465,2625 ; C38.1@5392.5,2625 R61.1@5455,2625 R61.1@5454.64,2625.36
NetC39_2: C39.2 U9.22 | length 127.8
  Top Layer w8: C39.2@5157.5,2950 5205,2950 5223.91,2931.1 U9.22@5277.48,2931.1
NetC42_1: C42.1 R61.2 U9.31 Y3.2 | length 526
  Top Layer w8: U9.31@5474.33,2812.98 5474.33,2675.67 R61.2@5520,2630
  Top Layer w10: R61.2@5520,2630 R61.2@5520,2625 ; C42.1@5582.5,2625 R61.2@5520,2625 ; Y3.2@5650,2495 5540,2495 5510,2525 5510,2615 R61.2@5520,2625
NetC43_1: C43.1 U9.20 | length 336.2
  Top Layer w8: C43.1@4959.92,2964.52 4985.4,2990 5195,2990 5214.53,2970.47 U9.20@5277.48,2970.47
NetC44_2: C44.2 R67.1 U12.3 | length 327.4
  Top Layer w12: C44.2@5502,3642.5 R67.1@5568,3642.5 5568,3683 5624.82,3739.82 U12.3@5624.82,3880.33
NetC47_2: C47.2 U12.7 | length 242.5
  Top Layer w12: C47.2@5424.82,3653.68 U12.7@5424.82,3880.33
  Top Layer w15: C47.2@5424.82,3653.68 C47.2@5436,3642.5
NetC51_2: C51.2 U12.8 | length 139.8
  Top Layer w10: C51.2@5370,3642.5 C51.2@5374.82,3647.32
  Top Layer w12: C51.2@5374.82,3647.32 U12.8@5374.82,3780.33
NetC59_1: C59.1 R68.1 R69.1 U12.6 | length 540.4
  Top Layer w15: R68.1@5542.5,3350 C59.1@5542.5,3415 v16(5575,3415) 5607.5,3415 R69.1@5610,3412.5
  Bottom Layer w12: U12.6@5474.82,3780.33 5474.82,3540.18 5575,3440
  Bottom Layer w15: v16(5575,3415) 5575,3440
NetC61_1: C61.1 L6.1 R43.2 U8.4 | length 920.8
  Top Layer w15: U8.4@718.05,2021.15 806.15,2021.15 835,2050 C61.1@907.5,2050
  Top Layer w45: L6.1@260,2347.64 260,2225 290,2195 465,2195 515,2145 515,2052.3 546.15,2021.15 U8.4@718.05,2021.15
NetC63_1: C63.1 R137.2 UG2.1 | length 188.1
  Top Layer w13: UG2.1@2378.09,669.39 2399.17,648.32 C63.1@2399.17,555 R137.2@2399.17,490
NetC65_1: C65.1 R129.2 UG1.1 | length 186.5
  Top Layer w13: UG1.1@2175.3,669.39 2192.5,652.19 C65.1@2192.5,555 R129.2@2192.5,490
NetC68_1: C68.1 J13.3 R100.1 | length 266.6
  Top Layer w10: C68.1@1353.12,3315 R100.1@1417.5,3314.99 1417.49,3357.49 1435,3375 J13.3@1435,3510
NetC69_1: C69.1 J13.6 R97.1 R99.1 | length 324.8
  Top Layer w20: J13.6@1485,3510 R97.1@1485,3312.5 1608.75,3312.5 C69.1@1611.25,3315
NetC70_1: C70.1 J13.2 R98.1 | length 278.5
  Top Layer w10: R98.1@1224.38,3314.99 1288.74,3314.99 1288.74,3383.74 1335,3430 J13.2@1335,3510
NetC71_1: C71.1 Q7.1 R110.1 R114.1 | length 221.1
  Top Layer w10: Q7.1@2545.49,3254.65 2622.85,3254.65 2625,3256.8 R114.1@2625,3332.5 C71.1@2560,3332.5
NetC73_2: C73.2 D12.1 LED3.2 Q5.2 RL1.1 | length 493.1
  Top Layer w20: Q5.2@3152.49,1249.65 3189.65,1249.65 3252.5,1312.5 C73.2@3280,1312.5
  Top Layer w30: RL1.1@3000,1030 3000,1160.25 LED3.2@3004.66,1164.91 D12.1@3137.59,1164.91 ; D12.1@3152.49,1179.82 Q5.2@3152.49,1249.65
NetC74_1: C74.1 D15.1 LED4.2 Q6.2 RL2.1 | length 472.1
  Top Layer w15: Q6.2@3567.49,1244.65 3609.65,1244.65 3677.5,1312.5 C74.1@3690,1312.5
  Top Layer w30: RL2.1@3425,1030 3425,1150.25 LED4.2@3429.66,1154.91 3547.41,1154.91 D15.1@3552.5,1160 ; D15.1@3567.49,1174.99 Q6.2@3567.49,1244.65
NetC75_1: C75.1 D20.1 LED7.2 Q9.2 RL3.1 | length 502.7
  Top Layer w12: Q9.2@3967.49,1249.65 4004.65,1249.65 4072.5,1317.5 C75.1@4095,1317.5
  Top Layer w30: RL3.1@3850,1030 3834.66,1045.34 LED7.2@3834.66,1159.91 3947.41,1159.91 D20.1@3947.5,1160 3967.49,1179.99 Q9.2@3967.49,1249.65
NetC76_2: C76.2 D17.1 LED6.2 Q8.2 RL4.1 | length 502.4
  Top Layer w12: Q8.2@4397.49,1244.65 4439.65,1244.65 4502.5,1307.5 C76.2@4525,1307.5
  Top Layer w30: RL4.1@4275,1030 4264.66,1040.34 LED6.2@4264.66,1154.91 4392.59,1154.91 4397.49,1159.82 Q8.2@4397.49,1244.65
NetC77_1: C77.1 Q5.1 R121.2 R125.2 | length 236.3
  Top Layer w20: R121.2@3187.5,1465 R125.2@3187.5,1395 ; Q5.1@3190.49,1329.65 3187.5,1332.65 R125.2@3187.5,1395 ; C77.1@3280,1377.5 3205,1377.5 R125.2@3187.5,1395
NetC78_2: C78.2 Q6.1 R122.2 R126.2 | length 227.2
  Top Layer w20: R122.2@3602.5,1460 R126.2@3602.5,1390 ; Q6.1@3605.49,1324.65 3602.5,1327.65 R126.2@3602.5,1390 ; C78.2@3690,1382.5 3610,1382.5 R126.2@3602.5,1390
NetC79_2: C79.2 Q9.1 R123.2 R127.2 | length 229.3
  Top Layer w12: Q9.1@4005.49,1329.65 4002.5,1332.65 R127.2@4002.5,1390 R123.2@4002.5,1460 4015,1447.5 C79.2@4095,1447.5
NetC80_1: C80.1 Q8.1 R124.2 R128.2 | length 227.2
  Top Layer w12: Q8.1@4435.49,1324.65 4432.5,1327.65 R128.2@4432.5,1385 R124.2@4432.5,1455 4440,1447.5 C80.1@4525,1447.5
NetC82_1: C82.1 R141.2 UG4.1 | length 183
  Top Layer w13: UG4.1@2783.68,669.39 2783.68,563.82 C82.1@2792.5,555 R141.2@2792.5,490
NetC84_1: C84.1 R139.2 UG3.1 | length 189.7
  Top Layer w13: UG3.1@2580.89,669.39 2605.83,644.45 C84.1@2605.83,555 R139.2@2605.83,490
NetC85_1: C85.1 U16.3 | length 121.3
  Top Layer w12: C85.1@1495,1027.5 1517.5,1027.5 1545.3,999.7 U16.3@1604.8,999.7
NetC85_2: C85.2 U16.1 | length 112.8
  Top Layer w12: C85.2@1495,1092.5 1502.2,1099.7 U16.1@1604.8,1099.7
NetC86_1: C86.1 U16.2 | length 210.5
  Top Layer w12: U16.2@1604.8,1049.7 1664.7,1049.7 1677.5,1062.5 C86.1@1677.5,1195
NetC87_1: C87.1 U16.5 | length 111
  Top Layer w12: C87.1@1495,902.5 1602,902.5 U16.5@1604.8,899.7
NetC87_2: C87.2 U16.4 | length 117.2
  Top Layer w12: C87.2@1495,967.5 1532.5,967.5 1550.3,949.7 U16.4@1604.8,949.7
NetC88_2: C88.2 U16.6 | length 112.8
  Top Layer w12: C88.2@1495,842.5 1502.2,849.7 U16.6@1604.8,849.7
NetC89_2: C89.2 U5.1 | length 62.4
  Top Layer w15: U5.1@1260.24,869.85 C89.2@1322.65,869.85
NetC90_1: C90.1 U5.6 | length 160.5
  Top Layer w10: C90.1@1087.5,555 1087.5,582.5 1105,600 1145,600 1160.24,615.24 U5.6@1160.24,661.98
NetC90_2: C90.2 R27.1 | length 60
  Top Layer w10: C90.2@1152.5,555 R27.1@1212.5,555
NetD1_2: D1.2 R21.1 | length 97.6
  Top Layer w10: R21.1@5027.5,1475 5124.57,1475 D1.2@5124.91,1475.34
NetD2_2: D2.2 R20.1 | length 101.7
  Top Layer w10: R20.1@5027.5,1580 5114.57,1580 D2.2@5124.91,1590.34
NetD3_2: D3.2 R8.1 | length 88.2
  Top Layer w10: D3.2@2910.35,2637.49 2995.01,2637.49 R8.1@2997.5,2635
NetD4_2: D4.2 R39.1 | length 89.6
  Top Layer w15: R39.1@5812.5,1480 5817.84,1485.34 D4.2@5899.91,1485.34
NetD5_2: D5.2 R37.1 | length 87.6
  Top Layer w15: R37.1@5817.5,1595 5817.84,1595.34 D5.2@5904.91,1595.34
NetD6_1: D6.1 Q2.2 U11.2 | length 467.9
  Top Layer w15: Q2.2@5375.35,2082.49 5464.99,2082.49 D6.1@5480,2097.5 5699.74,2097.5 U11.2@5796.85,2194.61
NetD6_2: D6.2 R56.1 U11.1 | length 456.3
  Top Layer w15: R56.1@5372.5,1965 5730.39,1965 U11.1@5800,1895.39
NetD7_1: D7.1 R40.1 R44.2 | length 194.6
  Top Layer w12: R40.1@2422.5,2900 R44.2@2422.5,2975 2490,2975 D7.1@2520.35,2944.65
  Top Layer w15: D7.1@2520.35,2935.49 D7.1@2520.35,2944.65
NetF1_2: F1.2 J10.1 U15.4 | length 858.4
  Top Layer w20: v1(2585,3815) F1.2@2585,3860 ; v1(2735,3600) U15.4@2735,3644
  Top Layer w30: J10.1@2230,4050 2250,4050 2295,4005 2400,4005 2545,3860 F1.2@2585,3860
  Bottom Layer w20: v1(2585,3815) 2685,3815 2735,3765 v1(2735,3600)
NetJ5_1: J5.1 J5.2 L4.2 L5.1 | length 411.3
  Top Layer w30: J5.2@4262.44,4060 J5.1@4341.18,4060 ; L4.2@4335,3880 L4.2@4341.18,3886.18
  Top Layer w40: L4.2@4335,3880 L5.1@4485,3880 ; L4.2@4341.18,3886.18 J5.1@4341.18,4060
NetJ10_2: J10.2 R86.1 R88.2 U15.3 | length 844.6
  Top Layer w10: J10.2@2131.57,4050 2131.57,4036.57 2105,4010 2105,3975 2120,3960 2380,3960 2477.5,3862.5 2477.5,3760 R86.1@2510,3727.5 R88.2@2580,3727.5 2587.5,3727.5 2660,3655 U15.3@2660,3644
NetJ10_3: J10.3 R87.1 R89.2 U15.2 | length 1058.3
  Top Layer w10: J10.3@2052.83,4050 2052.83,4042.17 2085,4010 2085,3960 2105,3940 2370,3940 2455,3855 2455,3760 2430,3735 R87.1@2430,3727.5 R89.2@2355,3727.5 ; U15.2@2660,3730 v1(2660,3775)
  Bottom Layer w10: v1(2395,3730) 2440,3775 v1(2660,3775)
NetJ15_42: J15.42 LED5.2 | length 992.5
  Top Layer w15: J15.42@1871.73,3616.65 1998.35,3616.65 2060,3555 2060,3275 2160,3175 2305,3175 2330,3200 2330,3310 2369.91,3349.91 LED5.2@2369.91,3360.34
NetLED1_1: LED1.1 R24.1 | length 127.7
  Top Layer w15: R24.1@2427.5,1740 2554.75,1740 LED1.1@2555.09,1739.66
NetLED1_2: LED1.2 Q1.2 | length 107.8
  Top Layer w15: LED1.2@2645.09,1739.66 2741.81,1739.66 Q1.2@2749.65,1747.51
NetLED2_1: LED2.1 R90.1 | length 112.7
  Top Layer w10: LED2.1@2834.66,3684.91 2835,3685.25 R90.1@2835,3797.5
NetLED3_1: LED3.1 R117.1 | length 112.7
  Top Layer w20: LED3.1@3004.66,1254.91 3005,1255.25 R117.1@3005,1367.5
NetLED4_1: LED4.1 R118.1 | length 112.7
  Top Layer w20: LED4.1@3429.66,1244.91 3430,1245.25 R118.1@3430,1357.5
NetLED5_1: LED5.1 R103.2 | length 100.7
  Top Layer w20: R103.2@2457.5,3460 2457.5,3362.75 LED5.1@2459.91,3360.34
NetLED6_1: LED6.1 R120.1 | length 112.7
  Top Layer w20: LED6.1@4264.66,1244.91 4265,1245.25 R120.1@4265,1357.5
NetLED7_1: LED7.1 R119.1 | length 107.7
  Top Layer w20: LED7.1@3834.66,1249.91 3835,1250.25 R119.1@3835,1357.5
NetQ1_1: Q1.1 R34.2 R35.2 | length 156.6
  Top Layer w15: Q1.1@2829.65,1709.51 2832.64,1712.5 R35.2@2905,1712.5 R34.2@2985,1712.5
NetQ2_1: Q2.1 R62.1 | length 67.4
  Top Layer w12: R62.1@5227.99,2120.49 Q2.1@5295.35,2120.49
NetQ3_1: Q3.1 R41.1 | length 76.6
  Top Layer w10: Q3.1@2599.65,3009.51 2602.65,3012.5 R41.1@2675,3012.5